# EAGLE board avoccado-avr-gin-icsp (EAGLE 7.2.0)
Avoccado PCB AVR
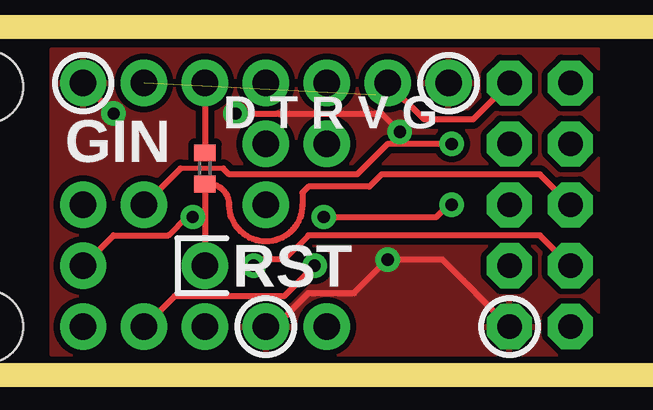
[diagram p0: board, top side]
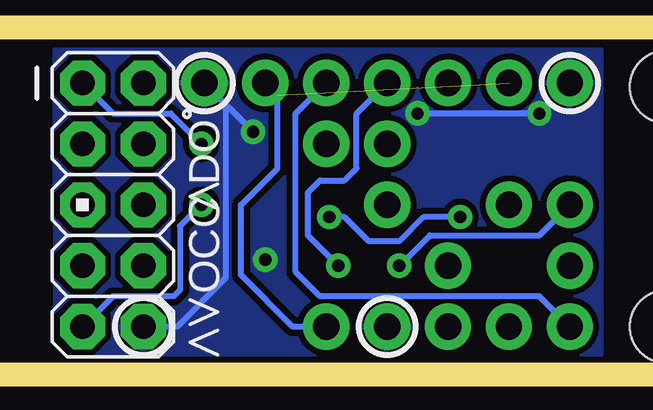
[diagram p1: board, bottom side, seen from below]

No outline drawn. Coordinates in mm, seen from the top.
Copper layers (1*16): Top 0.035mm / dielectric 1.5mm / Bottom 0.035mm
Design rules "SeeedStudio_2layer_DRU_no_angle_20140221 *": minimum track width 6mil, minimum drill 12mil, track to track 6mil, track to pad 6mil, pad to pad 6mil, via to via 6mil, smd to smd 0mil, copper to edge 10mil, drill to drill 10mil, minimum pad ring 10mil, minimum via ring 6mil, stop-mask expansion 0mil, vias tented up to drill 100mil, thermal gap 10mil
Net classes: 1 vcc: width 0.152 mm; 3 usbvcc: width 0.152 mm, drill 0.61 mm, clearance 0.152 mm
Holes 3 mm at -4,10 -4,0 26,10 26,0
Milling: 8 lines

## Footprints (pad centres in the part's own frame; a part is rotated, then mirrored left to right if it is on the bottom)
C0402 = smd 0.7 x 0.9: 1 -0.65,0; 2 0.65,0
P1-13 = drill 1.1 pad 1.93: TP 0,0
AVR_ICSP = drill 1.016 pad 1.88 octagon: 1 -1.27,5.08; 2 1.27,5.08; 3 -1.27,2.54; 4 1.27,2.54; 5 -1.27,0; 6 1.27,0; 7 -1.27,-2.54; 8 1.27,-2.54; 9 -1.27,-5.08; 10 1.27,-5.08

## Placement (x,y rotation side)
C1  [C0402]  5.08,6.6 90 top
TP1  PTR1PAD1-13  [P1-13]  5.08,10.16 0 top
TP3  PTR1PAD1-13  [P1-13]  10.16,10.16 0 top
TP4  PTR1PAD1-13  [P1-13]  7.62,7.62 0 top
TP5  PTR1PAD1-13  [P1-13]  7.62,10.16 0 top
TP8  PTR1PAD1-13  [P1-13]  12.7,10.16 0 top
TP13  PTR1PAD1-13  [P1-13]  7.62,5.08 0 top
TP17  PTR1PAD1-13  [P1-13]  10.16,7.62 0 top
TP18  PTR1PAD1-13  [P1-13]  15.24,10.16 0 top
TP19  PTR1PAD1-13  [P1-13]  2.54,5.08 0 top
TP20  PTR1PAD1-13  [P1-13]  0,5.08 0 top
TP21  PTR1PAD1-13  [P1-13]  0,2.54 0 top
TP22  PTR1PAD1-13  [P1-13]  2.54,10.16 0 top
TP23  PTR1PAD1-13  [P1-13]  5.08,2.54 0 top
TP24  PTR1PAD1-13  [P1-13]  0,10.16 0 top
TP25  PTR1PAD1-13  [P1-13]  0,0 0 top
TP26  PTR1PAD1-13  [P1-13]  2.54,0 0 top
TP28  PTR1PAD1-13  [P1-13]  10.16,0 0 top
TP29  PTR1PAD1-13  [P1-13]  7.62,0 0 top
TP30  PTR1PAD1-13  [P1-13]  5.08,0 0 top
U$1  AVR_SPI_PROG  [AVR_ICSP]  19.05,5.08 0 bottom

## Library data of the parts
C1 = rcl
TP1 TP3-TP5 TP8 TP13 TP17-TP26 TP28-TP30 = testpad
U$1 = SparkFun-Connectors

## Nets
3.3V: TP8.TP TP22.TP TP28.TP U$1.2
D5: TP17.TP
D7: TP13.TP
D8: TP4.TP
DTR: C1.2 TP1.TP
GND [vcc]: TP18.TP TP24.TP TP29.TP U$1.10
MISO: TP21.TP U$1.9
MOSI: TP19.TP U$1.1
RESET: C1.1 TP23.TP U$1.5
RXI: TP3.TP TP25.TP
SCK: TP20.TP U$1.7
TXO: TP5.TP TP26.TP
VBAT [vcc]: TP30.TP

## Tracks (layer width: path | path; a pad name or v marks a point on that pad's centre or on a via)
3.3V  (1 unrouted)
  Top 0.254: U$1.2 16.26,8.64 14.22,8.64 TP8.TP
  Bottom 0.254: TP28.TP 11.56,0 13.72,2.16 13.72,5.08 12.19,6.6 12.19,9.65 TP8.TP
DTR
  Top 0.254: TP1.TP C1.2
GND  (via drill 0.51 pad 1.02)
  Top 0.254: TP29.TP 8,0 9.4,1.4 11.3,1.4 v12.7,2.79 14.99,2.79 U$1.10 | TP24.TP v1.27,8.89 | v6.35,8.89 12.45,8.89 v13.21,8.13
  Bottom 0.254: U$1.10 16.38,0 14.35,2.03 14.35,9.27 TP18.TP v13.21,8.13 | v1.27,8.89 v6.35,8.89
  pour Bottom (isolate 0.254): -1.34,11.57 21.49,11.57 21.48,-1.18 -1.34,-1.18
  pour Top (isolate 0.254): -1.34,11.57 -1.34,-1.18 21.48,-1.18 21.48,11.59
MISO  (via drill 0.51 pad 1.02)
  Top 0.254: v4.57,4.57 4.32,4.57 3.56,3.81 1.27,3.81 TP21.TP | v10.03,4.57 14.73,4.57 15.24,5.08 v15.37,5.08
  Bottom 0.254: v4.57,4.57 6.1,4.57 7.11,3.56 8.38,3.56 9.4,4.57 v10.03,4.57 | v15.37,5.08 16.26,4.19 16.26,1.52 16.51,1.27 19.05,1.27 U$1.9
MOSI  (via drill 0.51 pad 1.02)
  Top 0.203: 5.84,6.6 4.06,6.6
  Top 0.254: v15.37,7.62 12.7,7.62 11.43,6.35 6.1,6.35 5.84,6.6 | 4.06,6.6 TP19.TP
  Bottom 0.254: U$1.1 19.05,8.89 16.64,8.89 v15.37,7.62
RESET
  Top 0.254: TP23.TP C1.1 5.22,5.95 arc-90 6.1,5.08 arc90 7.62,3.56 arc90 9.14,5.08 9.14,5.59 9.4,5.84 11.94,5.84 12.45,6.35 19.05,6.35 U$1.5
RXI
  Bottom 0.254: TP25.TP 1.27,1.27 10.41,1.27 11.43,2.29 11.43,8.89 TP3.TP
SCK  (via drill 0.51 pad 1.02)
  Top 0.254: U$1.7 19.05,3.81 9.4,3.81 8.38,2.79 7.37,2.79 v7.11,2.54
  Bottom 0.254: v7.11,2.54 5.84,3.81 1.27,3.81 TP20.TP
TXO  (via drill 0.51 pad 1.02)
  Top 0.254: v9.65,2.54 8.38,1.27 3.81,1.27 TP26.TP
  Bottom 0.254: v9.65,2.54 10.92,3.81 10.92,5.59 10.41,6.1 9.4,6.1 8.89,6.6 8.89,8.89 TP5.TP

## Text on the board
tPlace: D T R V G | GIN | RST
bPlace: OCC DO